# Altium PCB PCB1.PcbDoc
Units mil, origin at the board's own origin, x right, y up, seen from the top; angles counter-clockwise.
Board outline 2995 x 1245 mil, 2 copper layers (Top Layer, Bottom Layer); 12 components, 11 nets, 64 pads, 0 vias.
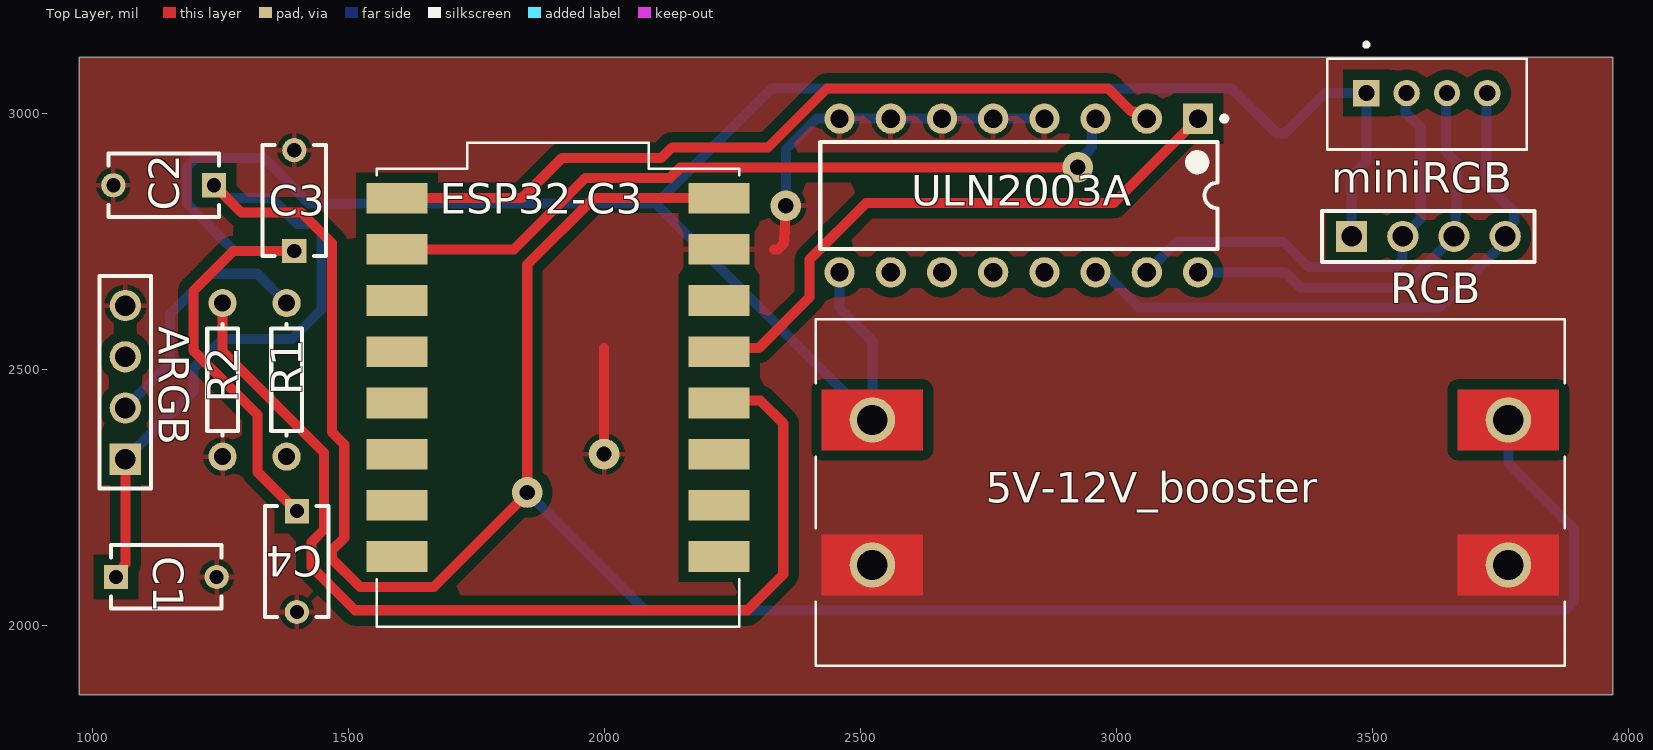
[diagram p0: Top Layer view]
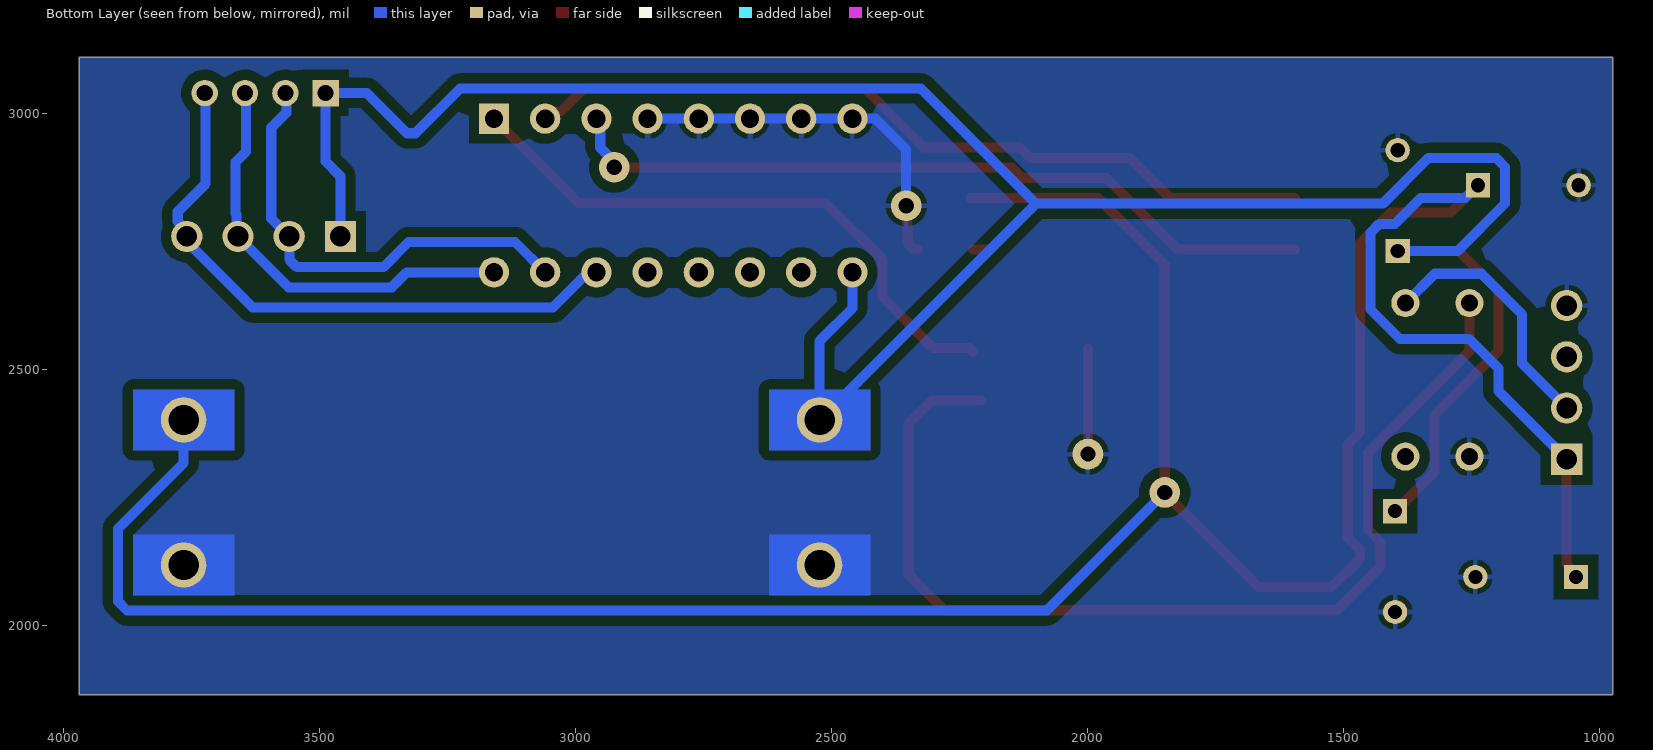
[diagram p1: Bottom Layer view, seen from below]
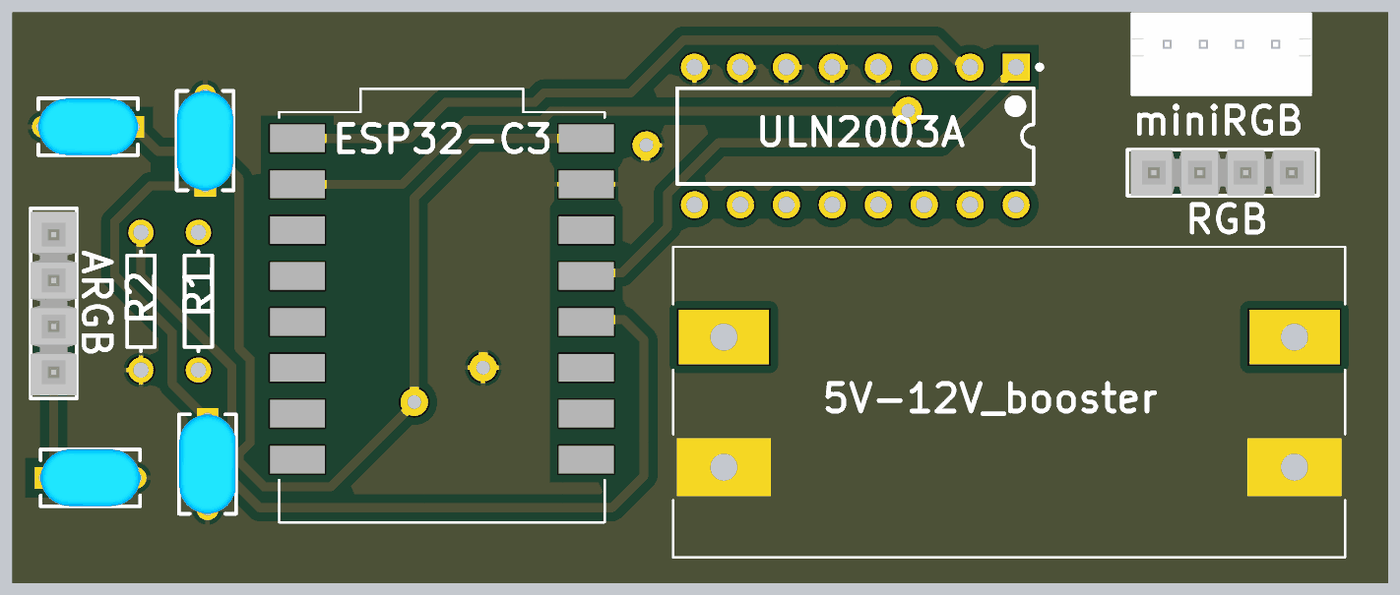
[diagram p2: 3D render of the assembled board from above, using the file's embedded part models]

## Layer stack, top to bottom
Top Solder: solder mask 0.4, Solder Resist, Dk 3.5
Top Layer: signal copper 1.4
Dielectric 1: dielectric 12.6, FR-4, Dk 4.8
Bottom Layer: signal copper 1.4
Bottom Solder: solder mask 0.4, Solder Resist, Dk 3.5

## Board outline
975,1865 3970,1865 3970,3110 975,3110

## Design rules (kind name [scope] priority, off if disabled: settings)
Clearance [All] p1: gap=19.68 ignorepadtopadclearanceinfootprint=FALSE
PolygonConnect [All] p1: connectstyle=Relief reliefconductorwidth=10 reliefentries=4 polygonreliefangle="90 Angle" airgapwidth=10
RoutingVias [All] p1: holewidth=28 width=50 viastyle="Through Hole" minholewidth=28 minwidth=50 maxholewidth=28 maxwidth=50
SolderMaskExpansion [All] p1: expansion=4 istentingtop=FALSE
SupplyNets "Schematic Supply Nets" [InNet('GND')] p1: voltage=0.000
Width [All] p1: maxlimit=19.68 minlimit=19.68 preferedwidth=19.68 minimp=50.000000 maximp=50.000000 favimp=50.000000
30 further rules are at their usual default settings.

## Components (designator, comment, footprint, x,y, rotation, side; value= is the part's Value field where it differs from the comment)
5V-12V_booster "MT3608_DC-DC_STEP_UP_CONVERTER_2A_BOOSTER_MODULE" MODULE_MT3608_DC-DC_STEP_UP_CONVERTER_2A_BOOSTER_MODULE 3145,2260 r0 top
ARGB "TSW-104-08-T-S" SMTC-TSW-104-08-X-S 1065,2325 r90 top
C1 "200nF" FP-RDE2M1-MFG 1145,2095 r0 top
C2 "200nF" FP-RDE2M1-MFG 1140,2860 r180 top
C3 "200nF" FP-RDE2M1-MFG 1395,2830 r90 top
C4 "200nF" FP-RDE2M1-MFG 1400,2125 r270 top
ESP32-C3 "ESP32-C3_SUPERMINI_SMD" MODULE_ESP32-C3_SUPERMINI 1910,2445 r0 top
miniRGB "B4B-PH-K-S(LF)(SN)" JST_B4B-PH-K-S(LF)(SN) 3606.89,3018.35 r180 top
R1 "" AXIAL-0.3 1380,2480 r270 top value=1k
R2 "" AXIAL-0.3 1255,2480 r270 top value=2k
RGB "ARGB" SMTC-TSW-104-08-X-S 3460,2760 r0 top
ULN2003A "ULN2003A" STM-DIP-16L 2810,2840 r270 top

## Footprints (in the part's own frame and the unit in brackets; to place one, negate y for a bottom-side part, rotate by r counter-clockwise, add the part's x,y. Pads: shape width x height; smd on the part's side, far side on the other; paste and mask are expansions set on the pad)
AXIAL-0.3 [mm] "Axial Device, Thru-Hole; 2 Leads; 0.3 in Pin Spacing"
  round 1.4 hole 0.85: 1(-3.81,0) 2(3.81,0)
  silkscreen extent -2.77,-0.76 2.77,0.76
FP-RDE2M1-MFG [mm]
  rect 1.2x1.2 hole 0.7 paste-2539.97 mask+0: 1(-2.5,0)
  round 1.2 hole 0.7 paste-2539.97 mask+0: 2(2.5,0)
  silkscreen extent -2.75,-1.58 2.75,1.58, body extent -3.2,-1.68 3.2,1.68, height 0.25
JST_B4B-PH-K-S(LF)(SN) [mm]
  rect 1.308x1.308 / inner round 1.308 / far side rect 1.308x1.308 hole 0.8: 1(3,-0.55)
  round 1.308 hole 0.8: 2(1,-0.55) 3(-1,-0.55) 4(-3,-0.55)
  silkscreen extent -4.95,-3.05 4.95,2.25, body extent -4.95,-2.25 4.95,2.25, height 6
MODULE_ESP32-C3_SUPERMINI [mm]
  rect 3.025x1.524 smd: 0(7.985,-7.88) 1(7.985,-5.34) 2(7.985,-2.8) 3(7.985,-0.26) 3.3(7.985,4.82) 4(7.985,2.28) 5(-7.985,9.9) 5V(7.985,9.9) 6(-7.985,7.36) 7(-7.985,4.82) 8(-7.985,2.28) 9(-7.985,-0.26) 10(-7.985,-2.8) 20(-7.985,-5.34) 21(-7.985,-7.88) G(7.985,7.36)
  silkscreen extent -9,-11.35 9,12.65
MODULE_MT3608_DC-DC_STEP_UP_CONVERTER_2A_BOOSTER_MODULE [mm]
  round 2.25 hole 1.5 mask+0: VIN_N(15.775,-3.6) VIN_P(15.775,3.6) VOUT_N(-15.775,-3.6) VOUT_P(-15.775,3.6)
  Top Layer region: -13.275,2.1 -18.275,2.1 -18.275,5.1 -13.275,5.1
  Top Layer region: -13.275,-5.1 -18.275,-5.1 -18.275,-2.1 -13.275,-2.1
  Top Layer region: 18.275,-5.1 13.275,-5.1 13.275,-2.1 18.275,-2.1
  Top Layer region: 18.275,2.1 13.275,2.1 13.275,5.1 18.275,5.1
  Bottom Layer region: -13.275,2.1 -18.275,2.1 -18.275,5.1 -13.275,5.1
  Bottom Layer region: -13.275,-5.1 -18.275,-5.1 -18.275,-2.1 -13.275,-2.1
  Bottom Layer region: 18.275,-5.1 13.275,-5.1 13.275,-2.1 18.275,-2.1
  Bottom Layer region: 18.275,2.1 13.275,2.1 13.275,5.1 18.275,5.1
  silkscreen extent -18.57,-8.6 18.57,8.6
SMTC-TSW-104-08-X-S [mm] ".025 SQ Post Terminal Strip Assembly, 1x4 Pins, Vertical, 2.54mm Pitch, Male"
  rect 1.55x1.55 hole 1.02: 1(0,0)
  round 1.55 hole 1.02: 2(2.54,0) 3(5.08,0) 4(7.62,0)
  silkscreen extent -1.46,-1.27 9.08,1.27, body extent -1.27,-1.27 8.89,1.27, height 8.38
STM-DIP-16L [mm] "DIP, 16-Leads, Body 19.7x7.1mm, Pitch 2.54mm"
  rect 1.5x1.5 hole 0.9: 1(-3.81,8.89)
  round 1.5 hole 0.9: 2(-3.81,6.35) 3(-3.81,3.81) 4(-3.81,1.27) 5(-3.81,-1.27) 6(-3.81,-3.81) 7(-3.81,-6.35) 8(-3.81,-8.89) 9(3.81,-8.89) 10(3.81,-6.35) 11(3.81,-3.81) 12(3.81,-1.27) 13(3.81,1.27) 14(3.81,3.81) 15(3.81,6.35) 16(3.81,8.89)
  silkscreen extent -3.93,-9.85 2.65,10.32, body extent -3.95,-9.85 3.95,9.85, height 5.33

## Part data
5V-12V_booster: "MT3608-based step-up converter boosts 2Vâ€“24V input to 28V with up to 93% efficiency. Suitable for devices needing higher voltage than the source.", Package=Package, Check_prices=https://www.snapeda.com/parts/MT3608%20DC-DC%20Step%20Up%20Converter%202A%20Booster%20Module/Generic/view-part/?ref=eda, MF=Generic, MP="MT3608 DC-DC Step Up Converter 2A Booster Module", SnapEDA_Link=https://www.snapeda.com/parts/MT3608%20DC-DC%20Step%20Up%20Converter%202A%20Booster%20Module/Generic/view-part/?ref=snap
ARGB: library part CMP-1024-00356-1, "0.025\" SQ Post Header, Through-hole, Vertical, -55 to 105 degC, 2.54 mm Pitch, 4-Pin, Male, RoHS", Manufacturer=Samtec, Temperature Range="-55 to 105 degC", ComponentLink1Description="Manufacturer URL", ComponentLink1URL=http://www.samtec.com, ComponentLink2Description=Datasheet, ComponentLink2URL=http://www.samtec.com/documents/webfiles/pdf/TSW_TH.PDF, ComponentLink3Description="Package Specification", ComponentLink3URL=http://www.samtec.com/documents/webfiles/cpdf/TSW-XXX-XX-XXX-X-XX-XXX-MKT.pdf, DatasheetVersion=F-214, Mounting Technology=Through-hole, Orientation=Vertical, PackageDescription=".025[0.64] SQ. Post Terminal Strip Assembly", PackageReference=TSW-104-08-X-S, PackageVersion="DM, 8/1988", PartNumber=TSW-104-08-T-S, Pitch="2.54 mm", RoHS=True
C1 C2 C3 C4: library part CMP-06035-028300-1, "Ceramic Capacitor 10nF ±10% 630V X7R Radial", Capacitance=10nF, Case/Package=Radial, Dielectric=X7R, Max Operating Temperature=125°C, Min Operating Temperature=-55°C, Package Quantity=2000, Resistor Type=Ceramic, Tolerance=10%, Voltage Rating=630V, Height=4mm, Height - Seated (Max)=0.236inch, Lead Diameter=0.5mm, Lead Free="Lead Free", Lead Pitch=0.197inch, Lead/Base Style="Formed Leads", Length=0.217inch, Mount="Through Hole", Packaging="Tape and Reel", Termination=Radial, Voltage Rating (DC)=630V, Width=4mm
ESP32-C3: "Super tiny ESP32-C3 board", Package=None, Check_prices=https://www.snapeda.com/parts/ESP32-C3%20SuperMini_SMD/Espressif+Systems/view-part/?ref=eda, MF="Espressif Systems", MP="ESP32-C3 SuperMini_SMD", SnapEDA_Link=https://www.snapeda.com/parts/ESP32-C3%20SuperMini_SMD/Espressif+Systems/view-part/?ref=snap
miniRGB: "Connector Header Through Hole 4 position 0.079 (2.00mm)", Package=None, Check_prices=https://www.snapeda.com/parts/B4B-PH-K-S%20(LF)(SN)/JST/view-part/?ref=eda, MF="JST Sales", MP="B4B-PH-K-S (LF)(SN)", SnapEDA_Link=https://www.snapeda.com/parts/B4B-PH-K-S%20(LF)(SN)/JST/view-part/?ref=snap
R1 R2: library part Res1, "Resistor", LatestRevisionDate=17-Jul-2002, LatestRevisionNote="Re-released for DXP Platform.", PackageDescription="Axial Device, Thru-Hole; 2 Leads; 0.3 in Pin Spacing", PackageReference=AXIAL-0.3, Published=8-Jun-2000, Publisher="Altium Limited"
RGB: library part CMP-1024-00356-1, "0.025\" SQ Post Header, Through-hole, Vertical, -55 to 105 degC, 2.54 mm Pitch, 4-Pin, Male, RoHS", Manufacturer=Samtec, PartNumber=TSW-104-08-T-S, Temperature Range="-55 to 105 degC", ComponentLink1Description="Manufacturer URL", ComponentLink1URL=http://www.samtec.com, ComponentLink2Description=Datasheet, ComponentLink2URL=http://www.samtec.com/documents/webfiles/pdf/TSW_TH.PDF, ComponentLink3Description="Package Specification", ComponentLink3URL=http://www.samtec.com/documents/webfiles/cpdf/TSW-XXX-XX-XXX-X-XX-XXX-MKT.pdf, DatasheetVersion=F-214, Mounting Technology=Through-hole, Orientation=Vertical, PackageDescription=".025[0.64] SQ. Post Terminal Strip Assembly", PackageReference=TSW-104-08-X-S, PackageVersion="DM, 8/1988", Pitch="2.54 mm", RoHS=True
ULN2003A: library part CMP-2000-07351-1, "Seven Darlington Array, 50 V, 0.5 A, -40 to 85 degC, 16-Pin DIP, RoHS, Tube", Collector Emitter Voltage V(br)ceo=50V, DC Collector Current=500mA, DC Current Gain hFE=1000hFE, Manufacturer=STMicroelectronics, Operating Temperature Max=85°C, Output Current=0.5A, Package Description="16-Pin DIP, Body 19.7 x 7.1 mm, Pitch 2.54 mm", Package Reference=DIP-16L, Power Dissipation Pd=-, Transistor Case Style=DIP, Automotive Qualification Standard=-, Datasheet URL=http://www2.st.com/content/ccc/resource/technical/document/datasheet/f3/6e/c8/64/4d/b3/4e/38/CD00001244.pdf/files/CD00001244.pdf/jcr:content/translations/en.CD00001244.pdf, Datasheet Version="Rev. 8, 06/2012", Manufacturer URL=http://www.st.com/, Mounting Technology=ThroughHole, MSL=MSL2-1year, No. of Pins=16Pins, PartNumber=ULN2003A, Product Range=-, SVHC=NoSVHC(17-Dec-2015), Transistor Polarity=NPN, VOUT=50V

## Free pads (board coordinates)
  round 60 hole 30: 11(2925,2895) 13(2355,2820) 14(1850,2260) 16(2000,2335)

## Nets (pads, with @x,y where several pads share a name; then routed paths per layer and width w, separated by ;. In a path a pad name is that pad's centre, name@x,y a point inside that pad or via, vN(x,y) a via of type N, cw(c..) or ccw(c..) an arc to the next point about the centre after c; other vN are vias at no path point)
5V: 5V-12V_booster.VIN_P ARGB.1 C1.1 C2.1 ESP32-C3.5V pad.14 | length 5993.4
  Top Layer w19.68: C1.1 1060.35,2108.78 1060.35,2115.67 1065,2120.31 ARGB.1 ; C2.1 1291.6,2806.82 1408.75,2806.82 1468.33,2747.25 1468.33,2378.09 1492.52,2353.89 1492.52,2171.26 1468.33,2147.07 1468.33,2130.76 1523.85,2075.24 1667.41,2075.24 pad.14@1851.09,2258.91 ; pad.14 1850,2705 1979.76,2834.76 ESP32-C3.5V@2229.41,2834.76
  Bottom Layer w19.68: ARGB.1 1197.91,2457.91 1197.91,2502.24 1255.5,2559.83 1390.56,2559.83 1448.15,2617.42 1448.15,2767.43 1430.85,2784.72 1400.28,2784.72 1350,2835 1263.43,2835 C2.1 ; pad.14 2080.31,2029.69 3876.72,2029.69 3894.02,2046.98 3894.02,2189.55 3766.06,2317.51 5V-12V_booster.VIN_P
12V: 5V-12V_booster.VOUT_P C3.1 C4.1 miniRGB.1 RGB.1 ULN2003A.9 | length 4776.6
  Top Layer w19.68: C3.1 1275.84,2731.57 1197.91,2653.65 1197.91,2537.14 1322.91,2412.14 1322.91,2300.51 C4.1
  Bottom Layer w19.68: C3.1 1277.85,2731.57 1185.28,2824.15 1185.28,2895.85 1202.57,2913.15 1335.11,2913.15 1424.17,2824.09 2101.57,2824.09 ; ULN2003A.9 2460,2620 2523.94,2556.06 5V-12V_booster.VOUT_P 2101.57,2824.09 ; RGB.1 3460,2877.72 3488.78,2906.5 miniRGB.1 3408.35,3040 3329.83,2961.48 3313.52,2961.48 3225.94,3049.06 2326.54,3049.06 2101.57,2824.09
B: miniRGB.4 RGB.4 ULN2003A.14 | length 1176.8
  Bottom Layer w19.68: ULN2003A.14 2967.53,2682.47 2984.02,2682.47 3045.26,2621.22 3631.22,2621.22 3765,2755 3765,2776.19 3777.68,2788.86 3777.68,2808.51 3723.11,2863.08 miniRGB.4@3723.11,3015
DATA_3.3: ESP32-C3.3 R2.1 | length 2046.9
  Top Layer w19.68: R2.1 1255,2535.73 1453.15,2337.58 1453.15,2187.57 1428.96,2163.38 1428.96,2114.46 1513.5,2029.91 2279.91,2029.91 2350,2100 2350,2395 2305.24,2439.76 ESP32-C3.3@2209.37,2439.76
DATA_5: ARGB.2 R1.1 | length 503.3
  Bottom Layer w19.68: ARGB.2 1152.13,2512.13 1152.13,2607.86 1231.35,2687.09 1322.91,2687.09 R1.1
G: miniRGB.2 RGB.2 ULN2003A.15 | length 879.2
  Bottom Layer w19.68: ULN2003A.15 3119.06,2749.06 3326.77,2749.06 3375.86,2699.96 3544.96,2699.96 3559.73,2714.73 3559.73,2759.73 RGB.2 3595,2795 3595,2972.28 3565.63,3001.65 3565,3001.02 miniRGB.2@3565,3015
GND: 5V-12V_booster.VIN_N 5V-12V_booster.VOUT_N ARGB.4 C1.2 C2.2 C3.2 C4.2 ESP32-C3.G pad.13 pad.16 R2.2 ULN2003A.4 ULN2003A.5 ULN2003A.6 ULN2003A.7 ULN2003A.8 | length 1027.5
  Top Layer w19.68: ARGB.4@1065,2614.38 ARGB.4@1065,2636.19 ; pad.16 2000,2541.7 ; ESP32-C3.G@2194.82,2734.76 ESP32-C3.G ; 2332.28,2734.76 2339.55,2734.76 2351.08,2746.3 2351.94,2753.54 pad.13
  Bottom Layer w19.68: pad.13 2355,2930 2415,2990 ULN2003A.8 ULN2003A.7 ULN2003A.6 ULN2003A.5 ULN2003A.4 ULN2003A.4@2876.48,2990 ; 5V-12V_booster.VOUT_N 5V-12V_booster.VOUT_N@2523.94,2133.94
out4: ESP32-C3.4 ULN2003A.1 | length 1167.3
  Top Layer w19.68: ESP32-C3.4 2231.52,2541.91 2301.91,2541.91 2400.94,2640.94 2400.94,2714.46 2511.48,2825 2995,2825 ULN2003A.1
out5: ESP32-C3.5 ULN2003A.2 | length 1577.6
  Top Layer w19.68: ESP32-C3.5 1839.37,2834.76 1918.11,2913.5 2112.15,2913.5 2132.31,2933.66 2320.15,2933.66 2435.54,3049.05 2984.46,3049.05 3029.68,3003.83 3035.52,3003.83 3049.35,2990 ULN2003A.2
out6: ESP32-C3.6 pad.11 ULN2003A.3 | length 1494.2
  Top Layer w19.68: ESP32-C3.6 1824.09,2734.76 1963.46,2874.13 2128.46,2874.13 2148.61,2894.29 pad.11@2914.29,2894.29
  Bottom Layer w19.68: pad.11 2925,2905.91 2952.47,2933.38 2952.47,2982.47 ULN2003A.3
R: miniRGB.3 RGB.3 ULN2003A.16 | length 820.4
  Bottom Layer w19.68: ULN2003A.16 3330.15,2690 3359.56,2660.59 3561.27,2660.59 3651.16,2750.48 3651.16,2766.25 3662.77,2777.86 3662.77,2802.77 3665,2805 3665,2905 3644.37,2925.63 miniRGB.3@3644.37,3016.03
pads on no net: ARGB.3 ESP32-C3.0 ESP32-C3.1 ESP32-C3.2 ESP32-C3.3.3 ESP32-C3.7 ESP32-C3.8 ESP32-C3.9 ESP32-C3.10 ESP32-C3.20 ESP32-C3.21 R1.2 ULN2003A.10 ULN2003A.11 ULN2003A.12 ULN2003A.13

## Polygon pours and split planes (outlines as drawn)
GND on Top Layer "NONET_L-01_P-001" (solid, remove dead copper, pour order 2): 975,3110 3970,3110 3970,1865 975,1865
GND on Bottom Layer "NONET_L-01_P-001" (solid, remove dead copper, pour order 1): 975,3110 3970,3110 3970,1865 975,1865

## Silkscreen, mask and mechanical layers (free items; w line width, h text height)
Mechanical 1:
  lines w47.24: 975,1865 975,3110 ; 975,1865 3970,1865 ; 975,1865 975,3110 ; 975,1865 3970,1865 ; 975,3110 3970,3110 ; 975,3110 3970,3110 ; 3970,1865 3970,3110 ; 3970,1865 3970,3110

## Text inside footprints (layer, text, board x,y; h text height)
5V-12V_booster: Mechanical 13 "VIN_P" at 3656.81,2486.38 h50; Mechanical 13 "VIN_N" at 3656.81,1984.41 h50; Mechanical 13 "VOUT_P" at 2436.34,2486.38 h50; Mechanical 13 "VOUT_N" at 2436.34,1984.41 h50